# Altium PCB 7797-20-0226.PcbDoc
Units mil, origin at the board's own origin, x right, y up, seen from the top; angles counter-clockwise.
Board outline 355 x 400 mil, 2 copper layers (Top Layer, Bottom Layer), stack 12.8 mil thick; 8 components, 6 nets, 31 pads, 18 vias.
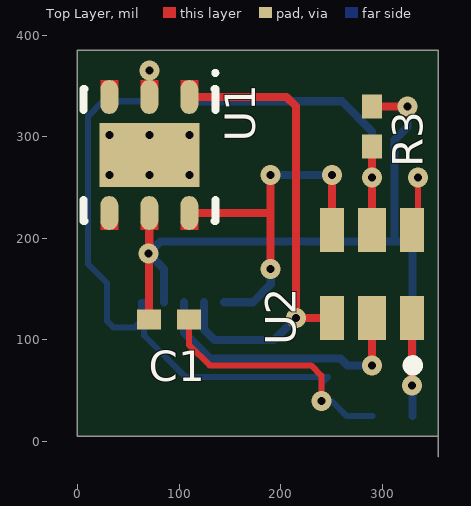
[diagram p0: Top Layer view]
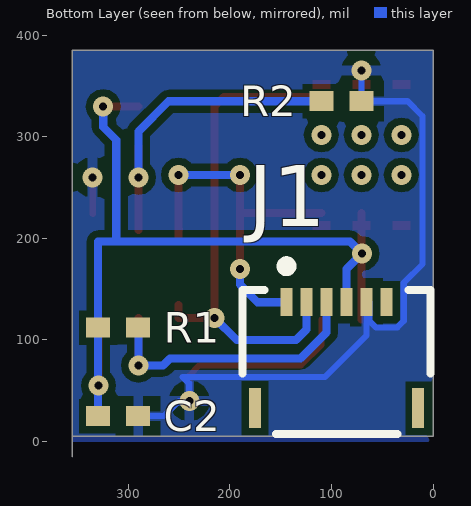
[diagram p1: Bottom Layer view, seen from below]

## Layer stack, top to bottom
Top Solder: solder mask 0.4, Solder Resist, Dk 3.5
Top Layer: signal copper 1.4
Dielectric 2: core 10, Dk 4.2
Bottom Layer: signal copper 1.4
Bottom Solder: solder mask 0.4, Solder Resist, Dk 3.5

## Board outline
355,5 0,5 0,385 355,385 355,-15

## Design rules (kind name [scope] priority, off if disabled: settings)
Clearance [All] p1: gap=7 ignorepadtopadclearanceinfootprint=FALSE except(0: Arc-Hole Track-Hole SMDPad-Hole THPad-Hole Via-Hole Fill-Hole Poly-Hole Region-Hole Text-Hole)
PolygonConnect [All] p1: connectstyle=Relief reliefconductorwidth=10 reliefentries=4 polygonreliefangle="90 Angle" airgapwidth=10
RoutingVias [All] p1: holewidth=28 width=50 viastyle="Through Hole" minholewidth=28 minwidth=50 maxholewidth=28 maxwidth=50 useviatemplates=TRUE viatemplateguid#1={21F20489-BC02-4CFF-80CD-74F1CE8BF212} viatemplatename#1=v50h20m-50
SolderMaskExpansion [All] p1: expansion=4
Width "Width Power" [(InNet('sGND') OR InNet('sPWR_3V7') OR InNet('sPWR_5V0') OR InNet('sUNREG') OR InNet('NetJ203_1') OR InNet('NetJ200_1') OR InNet('NetJ200_5'))] p1: maxlimit=15 minlimit=6 preferedwidth=15
Width [All] p2: maxlimit=10 minlimit=8 preferedwidth=8
30 further rules are at their usual default settings.

## Components (designator, comment, footprint, x,y, rotation, side; value= is the part's Value field where it differs from the comment)
C1 "GRM155R71A104KA01D" 0402 90,120 r180 top
C2 "GRM155R71A104KA01D" 0402 310,25 r0 bottom
J1 "503480-0600" MOLX-503480-0600 95,85 r180 bottom locked
R1 "CRCW040210K0FKED" 0402 310,112.12 r180 bottom
R2 "CRCW040210K0FKED" 0402 90,335 r180 bottom
R3 "DNP" 0402 290,310 r90 top
U1 "SI7006-A20-IM1" SLAB-DFN-6-1500X2400TP_V 70.63,282.09 r270 top
U2 "APDS-9303" APDS-9303 290,165 r90 top

## Footprints (in the part's own frame and the unit in brackets; to place one, negate y for a bottom-side part, rotate by r counter-clockwise, add the part's x,y. Pads: shape width x height; smd on the part's side, far side on the other; paste and mask are expansions set on the pad)
0402 [mm] "Chip Capacitor, Body 1.0x0.5mm, IPC High Density"
  rect 0.6x0.5 smd: 1(-0.5,0) 2(0.5,0)
  body extent -0.55,-0.3 0.55,0.3, height 1.3
APDS-9303 [mm]
  rect 1.1x0.6 smd: 1(-1.1,-1) 2(1.1,-1) 4(1.1,1) 5(-1.1,1)
  rect 1.1x0.7 smd: 3(1.1,0) 6(-1.1,0)
  body extent -1.3,-1.1 1.3,1.1, height 0.55
MOLX-503480-0600 [mm] "FPC Connector, 6-Leads, Right Angle, Pitch 0.5 mm, Mated Height 1.0 mm, SMT"
  rect 0.3x0.7 smd: 1(-1.25,1.325) 2(-0.75,1.325) 3(-0.25,1.325) 4(0.25,1.325) 5(0.75,1.325) 6(1.25,1.325)
  rect 0.3x1 smd: MP1(-2.04,-1.325) MP2(2.04,-1.325)
  silkscreen extent -2.35,-1.97 2.35,2.35, body extent -2.35,-1.98 2.35,1.62, height 1.91
SLAB-DFN-6-1500X2400TP_V [mm] "SON, 6-Leads, Body 3x3mm, Pitch 1mm, Thermal Pad 1.6x2.5mm"
  oval 0.85x0.45 smd mask-1: 1(-1.45,1) 2(-1.45,0) 3(-1.45,-1) 4(1.45,-1) 5(1.45,0) 6(1.45,1)
  rect 1.6x2.5 smd mask-1: 7(0,0)
  Top Layer region: 1.65,-1.225 1.875,-1.225 1.875,-0.775 1.65,-0.775
  Top Layer region: 1.65,-0.225 1.875,-0.225 1.875,0.225 1.65,0.225
  Top Layer region: -1.875,0.775 -1.65,0.775 -1.65,1.225 -1.875,1.225
  Top Layer region: -1.875,-0.225 -1.65,-0.225 -1.65,0.225 -1.875,0.225
  Top Layer region: -1.875,-1.225 -1.65,-1.225 -1.65,-0.775 -1.875,-0.775
  Top Layer region: 1.65,0.775 1.875,0.775 1.875,1.225 1.65,1.225
  silkscreen extent -2.1,-1.65 1.65,1.7, body extent -1.5,-1.5 1.5,1.5, height 0.8

## Part data
C1 C2: library part GRM155R71AxxxKdddd, "-55-125C, 1005, 10V, X7R, ±10%"
J1: library part CMP-1241-00113-1, "0.5 mm Pitch Easy-On(TM) BackFlip(TM) Type FPC Connector, 1.0 mm Mated Height, Right Angle, SMT, Dual Contact, 6 Circuits, -40 to 85 degC, ELV and RoHS Compliant, Tape and Reel"
R1 R2 R3: library part CRCW0402xxxxFKED, "0.125W, -55-155C, 1005, 50V, ±1%"
U1: library part CMP-2000-07060-1, "I2C Humidity and Temperature Sensor, 1.9 to 3.6 V, -40 to 125 degC, 6-Pin DFN, RoHS, Tube"

## Via types
v1: diameter 19.68, hole 7.87, Top Layer to Bottom Layer, 18 vias

## Nets (pads, with @x,y where several pads share a name; then routed paths per layer and width w, separated by ;. In a path a pad name is that pad's centre, name@x,y a point inside that pad or via, vN(x,y) a via of type N, cw(c..) or ccw(c..) an arc to the next point about the centre after c; other vN are vias at no path point)
I2C1_SCL: J1.1 U1.6 U2.4 | length 364.4
  Top Layer w8: U1.6 190,225 ; v1(190,170) 190,225 ; v1(190,262.4) 190,225 ; U2.4@250,208.94 U2.4 ; U2.4@250.63,200.63 U2.4 ; v1(250.63,262.4) U2.4
  Bottom Layer w8: J1.1 172.83,137.17 190.16,154.49 190.16,169.84 v1(190,170) ; v1(190,262.4) v1(250.63,262.4)
I2C1_SDA: J1.2 U1.1 U2.5 | length 495.9
  Top Layer w8: U1.1 205.83,339.17 215,330 v1(215,121.69) U2.5 U2.5@250.63,134.37
  Bottom Layer w8: J1.2 124.53,110.47 135,100 193.31,100 v1(215,121.69)
s3V3: C1.2 C2.2 J1.4 R1.1 R3.2 U1.5 U2.1 | length 842
  Top Layer w8: v1(70,185) 70,190 70.63,190.63 U1.5 ; C1.2 v1@70.31,189.69 ; R3.2 v1(324.69,329.69) ; v1(329.37,55) U2.1 U2.1@330,121.06
  Bottom Layer w8: J1.4 85.16,169.84 v1(70,185) 81.84,196.84 310,196.84 ; v1(324.69,329.69) 324.69,309.69 311.84,296.84 311.84,198.68 310,196.84 ; C2.2 329.69,54.68 v1(329.37,55) 329.69,55.32 R1.1 329.69,196.84 310,196.84
sGND: C1.1 C2.1 J1.5 R2.2 U1.2 U2.2 | length 943.1
  Top Layer w6: U1.2 v1(70.63,365) ; C1.1 109.68,95.32 130,75 230,75 240,65 v1(240,40) ; 334.69,250 335,250.31 v1(335,260) U2.2@335,223.94
  Bottom Layer w6: v1@70.31,364.68 R2.2 25,335 10.42,320.42 10.42,174.58 28.88,156.12 28.88,118.83 35.33,112.39 56.25,112.39 62.69,118.83 62.69,137.17 J1.5 65.47,104.53 106.48,63.52 246.48,63.52 240,57.04 v1(240,40) 250,40 265,25 C2.1
sLIGHT_ADDR: R2.1 R3.1 U2.3 | length 319.9
  Top Layer w8: U2.3 v1(290,260) R3.1
  Bottom Layer w8: R2.1 260.32,335 290,305.32 v1(290,260)
sLIGHT_INT: J1.3 R1.2 U2.6 | length 312.2
  Top Layer w8: v1(290,75) U2.6
  Bottom Layer w8: J1.3 104.84,107.53 130.53,81.84 259.05,81.84 265.89,75 v1(290,75) 290,111.8 R1.2
pads on no net: J1.6 J1.MP1 J1.MP2 U1.3 U1.4 U1.7
copper on no net:
  other v1: 31.26,262.4 70.63,262.4 110,262.4 31.26,301.77 70.63,301.77 110,301.77

## Polygon pours and split planes (outlines as drawn)
sGND on Bottom Layer "GND flood-Bottom" (solid, remove dead copper, pour order 0): 355,0 0,0 0,385 355,385

## Silkscreen, mask and mechanical layers (free items; w line width, h text height)
Top Overlay:
  circle w10: c330,75 r5
Mechanical 1:
  lines w10: 0,0 355,0 355,385 0,385 0,0